# EAGLE board main (EAGLE 5.09)
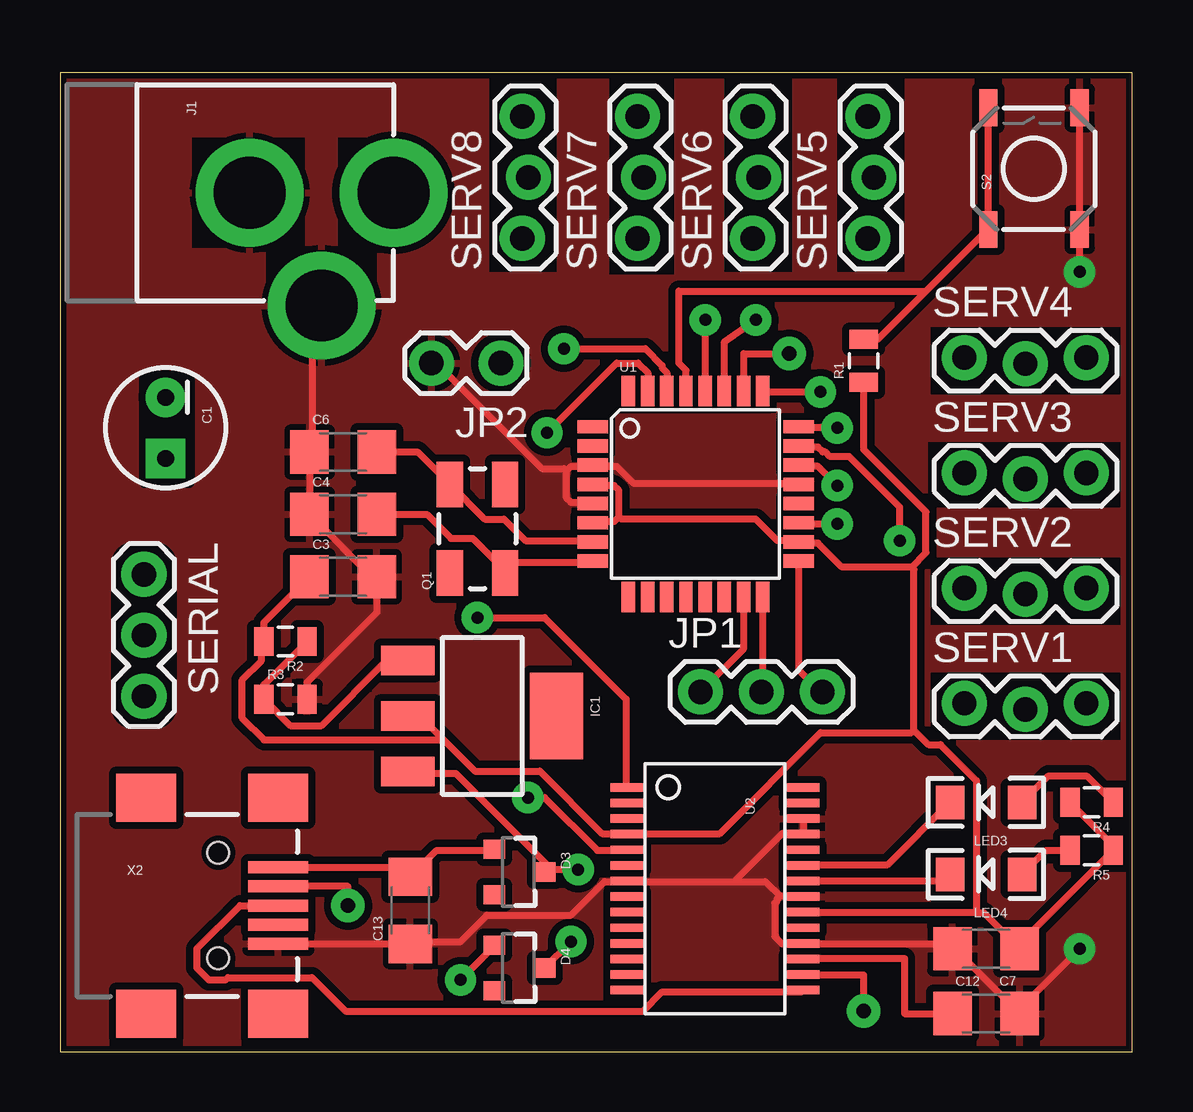
[diagram p0: board, top side]
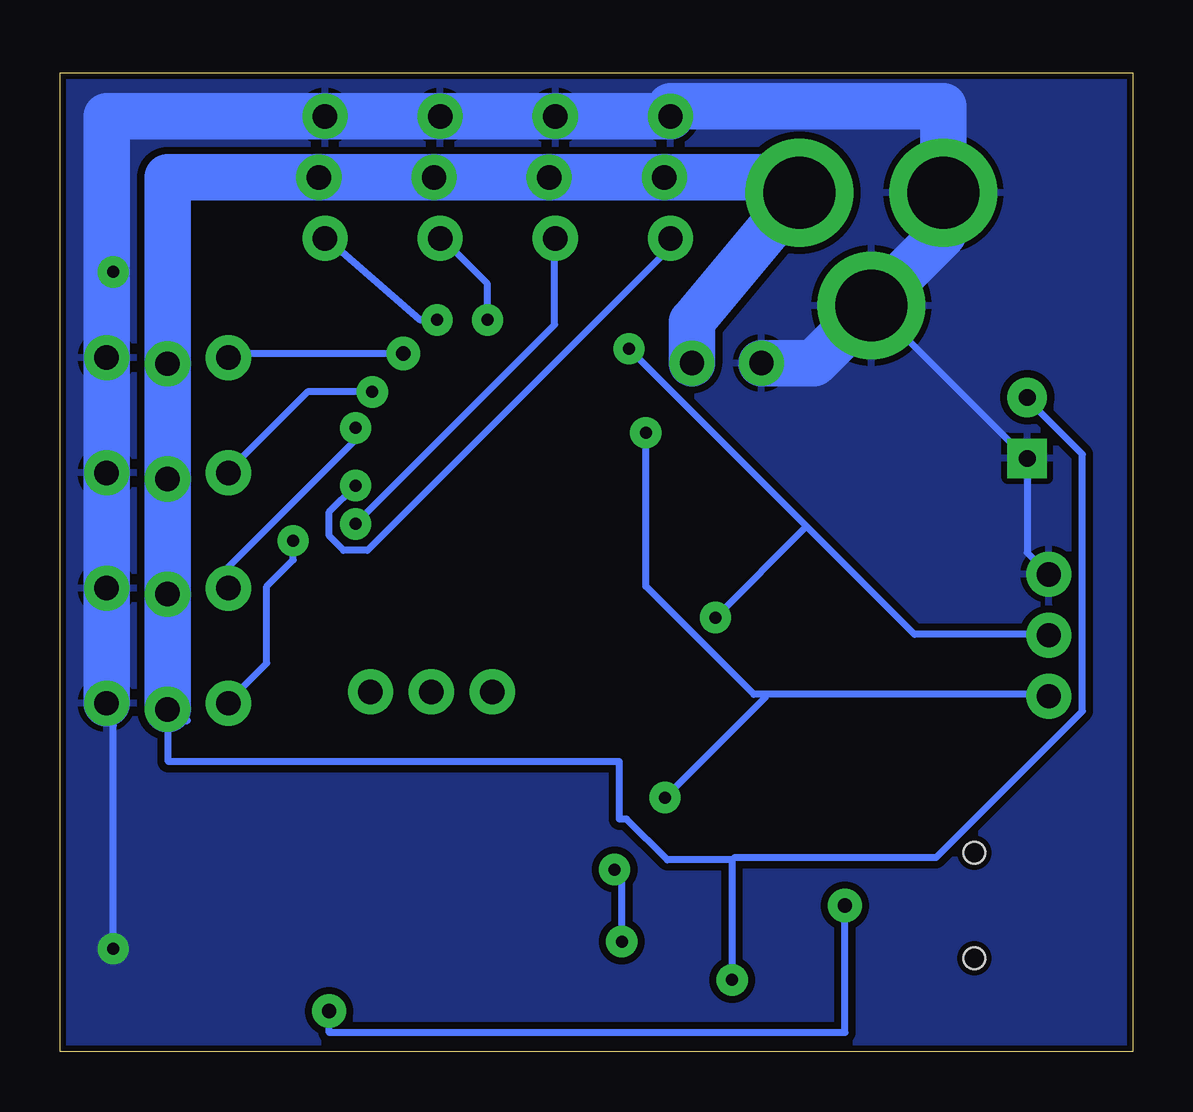
[diagram p1: board, bottom side, seen from below]

Size 44.7 x 40.8 mm. Coordinates in mm from the lower left corner, seen from the top.
Outline: 0,0 44.7,0 44.7,40.8 0,40.8 0,0
Copper layers (1*16): Top 0.035mm / dielectric 1.5mm / Bottom 0.035mm
Design rules "default *": minimum track width 0.3mm, minimum drill 0.5mm, track to track 0.3mm, track to pad 0.3mm, pad to pad 0.2mm, via to via 0.3mm, smd to smd 0.2mm, copper to edge 10mil, drill to drill 8mil, minimum pad ring 0.4mm, minimum via ring 0.4mm, stop-mask expansion 4mil, vias tented up to drill 0mil, thermal gap 10mil
tRestrict: area 36.3,27.4 to 44.2,30.2; area 36.2,22.7 to 44.2,25.4; area 36.3,17.8 to 44.2,20.6; area 36.3,13 to 44.2,15.8; area 5.5,33.5 to 10.2,38.1; area 11.6,33.6 to 13.8,38.1; area 8.6,31.3 to 13.2,33.4; area 17.9,32.5 to 20.7,40.4; area 22.9,32.4 to 25.6,40.4; area 27.7,32.5 to 30.5,40.4; area 32.4,32.5 to 35.2,40.4; area 3.5,23.7 to 5.4,28.2; 1 more areas
vRestrict: area 23,19.8 to 30,26.7; area 24.3,1.5 to 30.3,12.1; area 0.7,2.2 to 10,9.9; area 0.3,31.3 to 14,40.4; area 37.7,33.7 to 43.8,39.9; area 2,23.6 to 6.8,28.5

## Footprints (pad centres in the part's own frame; a part is rotated, then mirrored left to right if it is on the bottom)
CPOL-RADIAL-10UF-25V = drill 0.7 pad 1.651 square: 1 1.27,0 | drill 0.7 pad 1.651 round: 2 -1.27,0
1206 = smd 1.6 x 1.8: 1 -1.4,0; 2 1.4,0
SOT23-3 = smd 0.8 x 0.9: 1 -0.95,-1; 2 0.95,-1; 3 0,1.1
SOT223 = smd 1.219 x 2.235: 1 -2.311,-3.099; 2 0,-3.099; 3 2.311,-3.099 | smd 3.6 x 2.2: 4 0,3.099
POWER_JACK_PTH = drill 2.997 round: GND 0,7.7; GNDBREAK 4.7,10.7; PWR 0,13.7
1X03 = drill 1.016 pad 1.88 round: 1 0,0; 2 2.54,0; 3 5.08,0
1X02_LOCK = drill 1.016 pad 1.88 round: 1 -0.178,0; 2 2.718,0
LED-1206 = smd 1.2 x 1.4: A -1.5,0; C 1.5,0
CRYSTAL-SMD-5X3 = smd 1.9 x 1.1: 1 -1.85,-1.15; 2 1.85,-1.15; 3 1.85,1.15; 4 -1.85,1.15
0805 = smd 0.8 x 1.2: 1 -0.9,0; 2 0.9,0
TACTILE_SWITCH_SMD = smd 1.524 x 0.762: 1 -2.54,1.905; 2 2.54,1.905; 3 -2.54,-1.905; 4 2.54,-1.905
1X03_LOCK = drill 1.016 pad 1.88 round: 1 0,0.127; 2 2.54,-0.127; 3 5.08,0.127
TQFP32-08 = smd 1.27 x 0.559: 1 -4.293,2.8; 2 -4.293,2; 3 -4.293,1.2; 4 -4.293,0.4; 5 -4.293,-0.4; 6 -4.293,-1.2; 7 -4.293,-2; 8 -4.293,-2.8; 17 4.293,-2.8; 18 4.293,-2; 19 4.293,-1.2; 20 4.293,-0.4; 21 4.293,0.4; 22 4.293,1.2; 23 4.293,2; 24 4.293,2.8 | smd 0.559 x 1.27: 9 -2.8,-4.293; 10 -2,-4.293; 11 -1.2,-4.293; 12 -0.4,-4.293; 13 0.4,-4.293; 14 1.2,-4.293; 15 2,-4.293; 16 2.8,-4.293; 25 2.8,4.293; 26 2,4.293; 27 1.2,4.293; 28 0.4,4.293; 29 -0.4,4.293; 30 -1.2,4.293; 31 -2,4.293; 32 -2.8,4.293
SSOP28DB = smd 0.348 x 1.397: 1 -4.225,-3.656; 2 -3.575,-3.656; 3 -2.925,-3.656; 4 -2.275,-3.656; 5 -1.625,-3.656; 6 -0.975,-3.656; 7 -0.325,-3.656; 8 0.325,-3.656; 9 0.975,-3.656; 10 1.625,-3.656; 11 2.275,-3.656; 12 2.925,-3.656; 13 3.575,-3.656; 14 4.225,-3.656; 15 4.225,3.656; 16 3.575,3.656; 17 2.925,3.656; 18 2.275,3.656; 19 1.625,3.656; 20 0.975,3.656; 21 0.325,3.656; 22 -0.325,3.656; 23 -0.975,3.656; 24 -1.625,3.656; 25 -2.275,3.656; 26 -2.925,3.656; 27 -3.575,3.656; 28 -4.225,3.656
USB-MINIB = smd 2.5 x 0.5: D+ 2.5,0; D- 2.5,0.8; GND 2.5,-1.6; ID 2.5,-0.8; VBUS 2.5,1.6 | smd 2.5 x 2: GND@1 -3,-4.5; GND@2 -3,4.5; GND@3 2.5,4.5; GND@4 2.5,-4.5 | hole 0.9: 0,2.2; 0,-2.2

## Placement (x,y rotation side)
C1  [CPOL-RADIAL-10UF-25V]  4.4,26 270 top
C3  [1206]  11.8,19.8 0 top
C4  [1206]  11.8,22.4 0 top
C6  [1206]  11.8,25 0 top
C7  [1206]  38.6,4.3 180 top
C12  [1206]  38.6,1.6 0 top
C13  [1206]  14.6,5.9 90 top
D3  [SOT23-3]  19.1,7.5 270 top
D4  [SOT23-3]  19.1,3.5 270 top
IC1  [SOT223]  17.6,14 270 top
J1  POWER_JACKPTH  [POWER_JACK_PTH]  0.2,35.8 270 top
JP1  [1X03]  26.7,15 0 top
JP2  [1X02_LOCK]  18.2,28.7 180 top
LED3  [LED-1206]  38.6,10.4 180 top
LED4  [LED-1206]  38.6,7.4 180 top
Q1  [CRYSTAL-SMD-5X3]  17.4,21.8 90 top
R1  [0805]  33.5,28.8 90 top
R2  [0805]  9.4,17.1 180 top
R3  [0805]  9.4,14.7 0 top
R4  [0805]  43,10.4 180 top
R5  [0805]  43,8.4 180 top
S2  [TACTILE_SWITCH_SMD]  40.6,36.8 90 top
SERIAL  [1X03]  3.5,19.9 270 top
SERV1  [1X03_LOCK]  37.7,14.4 0 top
SERV2  [1X03_LOCK]  37.7,19.2 0 top
SERV3  [1X03_LOCK]  37.7,24 0 top
SERV4  [1X03_LOCK]  37.7,28.8 0 top
SERV5  [1X03_LOCK]  33.8,33.9 90 top
SERV6  [1X03_LOCK]  29,33.9 90 top
SERV7  [1X03_LOCK]  24.2,33.9 90 top
SERV8  [1X03_LOCK]  19.4,33.9 90 top
U1  ATMEGA168  [TQFP32-08]  26.49,23.25 0 top
U2  FT232RL-BASICSSOP  [SSOP28DB]  27.3,6.8 270 top
X2  USBSMD  [USB-MINIB]  6.6,6.1 0 top

## Library data of the parts
C1 C3 C4 C6 C7 C12 C13 D3 D4 IC1 J1 JP1 JP2 LED3 LED4 Q1 R1-R5 S2 SERIAL SERV1-SERV8 U1 U2 X2 = SparkFun

## Nets
5V: C3.1 C7.1 IC1.2 R1.1 R2.2 R4.2 R5.1 U1.4 U1.6 U1.18 U2.4 U2.20
GND: C1.1 C3.2 C4.1 C6.1 C7.2 C12.2 C13.1 J1.GND J1.GNDBREAK JP2.2 R3.2 S2.3 S2.4 SERIAL.1 SERV1.3 SERV2.3 SERV3.3 SERV4.3 SERV5.3 SERV6.3 SERV7.3 SERV8.3 U1.3 U1.5 U1.21 U2.7 U2.18 U2.21 U2.25 U2.26 X2.GND
N$1: LED4.A R5.2
N$2: U2.16 X2.D-
N$3: C6.2 Q1.3 U1.7
N$4: C4.2 Q1.1 U1.8
N$5: SERV1.1 U1.23
N$6: R1.2 S2.1 S2.2 U1.29
N$7: SERV2.1 U1.24
N$8: SERV3.1 U1.25
N$9: SERV4.1 U1.26
N$10: U2.15 X2.D+
N$11: LED4.C U2.22
N$12: LED3.C U2.23
N$13: C12.1 U2.17
N$14: SERIAL.3 U1.31 U2.5
N$15: SERIAL.2 U1.30 U2.1
N$16: LED3.A R4.1
N$17: SERV5.1 U1.27
N$18: SERV6.1 U1.28
N$19: JP1.1 U1.15
N$20: JP1.2 U1.16
N$21: JP1.3 U1.17
N$22: SERV7.1 U1.19
N$23: C1.2 D4.1 J1.PWR JP2.1 SERV1.2 SERV2.2 SERV3.2 SERV4.2 SERV5.2 SERV6.2 SERV7.2 SERV8.2
N$24: SERV8.1 U1.22
N$25: C13.2 D3.1 X2.VBUS
N$27: IC1.1 R2.1 R3.1
N$28: D3.3 D4.3 IC1.3

## Tracks (layer width: path | path; a pad name or v marks a point on that pad's centre or on a via)
5V
  Top 0.3: C3.1 8.5,17.9 R2.2 8.4,17 8.4,16.3 7.6,15.5 7.6,13.9 8.5,13 15.8,13 15.9,13.1 | 15.9,13.1 15,14 IC1.2 | 15.9,13.1 17.3,11.7 20,11.7 22.6,9.1 23.6,9.1 U2.4 23.7,9.1 27.5,9.1 31.7,13.3 35.5,13.3 35.6,13.4 | R4.2 43.9,8.6 R5.1 40,4.5 C7.1 38.5,5.8 38.2,5.8 | 38.2,5.8 31,5.8 U2.20 | 23.3,22.3 23.1,22.1 22.2,22.1 U1.6 | 23.3,22.3 23.3,23.4 23.1,23.6 22.2,23.6 U1.4 | R1.1 33.5,25.1 36.1,22.5 36.1,20.8 35.5,20.2 | 35.5,20.2 32.6,20.2 31.6,21.2 30.8,21.2 U1.18 30.7,21.3 29.9,21.3 29,22.2 23.4,22.2 23.3,22.3 | 35.6,13.4 36.2,12.8 36.7,12.8 38.2,11.3 38.2,5.8 | 35.6,13.4 35.6,20.1 35.5,20.2
GND  (via drill 0.5)
  Top 0.3: X2.GND C13.1 14.7,4.6 16.7,4.6 17.8,5.7 21.3,5.7 22.7,7.1 23.5,7.1 U2.7 23.7,7.1 28.2,7.1 | U2.26 31,9.7 31,9.1 U2.25 30.9,9.1 30.1,9.1 28.2,7.2 28.2,7.1 | 28.2,7.1 29.4,7.1 30,6.5 | 30,6.5 30.9,6.5 U2.21 | R3.2 10.3,15.4 13.2,18.3 C3.2 13.1,19.7 C4.1 C6.1 10.5,25.1 10.5,30.7 J1.GNDBREAK | 21.1,24.2 21.1,23.1 21.3,22.9 22.1,22.9 U1.5 | 21.1,24.2 21.3,24.4 22.1,24.4 U1.3 22.3,24.4 23.2,24.4 23.9,23.7 30.7,23.7 U1.21 | S2.4 42.5,39.3 42.5,34.3 S2.3 42.5,34.2 v42.5,32.5 | v42.5,4.3 40,1.8 C12.2 37.3,4.3 C7.2 37,4.5 31,4.5 U2.18 30.9,4.5 30.1,4.5 29.8,4.8 29.8,6.2 29.9,6.3 29.9,6.4 30,6.5 | 21.1,24.2 21,24.3 20.1,24.3 15.7,28.7 JP2.2
  Bottom 0.3: SERIAL.1 4.4,20.8 C1.1 4.5,24.8 10.2,30.5 J1.GNDBREAK | 42.78,32.5 v42.5,32.5 | v42.5,4.3 42.5,13.6 SERV1.3
  Bottom 1.93: 7.9,38.98 7.9,39.4 19.27,39.4 SERV8.3
  Bottom 1.94: SERV1.3 SERV2.3 SERV3.3 SERV4.3 42.78,32.5 42.78,38.98 SERV5.3 SERV6.3 SERV7.3 SERV8.3 | 7.9,38.98 J1.GND 7.9,34.1 J1.GNDBREAK 13.3,28.7 JP2.2
  pour Top: 0.1,40.9 44.8,40.9 44.8,0 0.1,0
  pour Bottom: 0.1,40.6 44.7,40.6 44.7,0.1 0.1,0.1
N$1
  Top 0.3: R5.2 41.1,8.4 LED4.A
N$2  (via drill 0.6)
  Top 0.3: X2.D- 12,6.9 v12,6.1 | v33.5,1.7 33.5,3.2 30.96,3.2 U2.16
  Bottom 0.3: v12,6.1 12,0.8 33.5,0.8 v33.5,1.7
N$3
  Top 0.3: U1.7 22.1,21.3 19.4,21.3 18.5,22.2 17.7,22.2 Q1.3 14.9,25 C6.2
N$4
  Top 0.3: U1.8 22.1,20.4 19,20.4 Q1.1 18.5,20.1 17.2,21.4 16.3,21.4 15.3,22.4 C4.2
N$5  (via drill 0.5)
  Top 0.3: v35,21.3 35,22.7 32.9,24.8 32.1,24.8 31.9,25 31.8,25 31.6,25.2 30.8,25.2 U1.23
  Bottom 0.3: v35,21.3 35,20.5 36.1,19.4 36.1,16.2 37.7,14.6 SERV1.1
N$6
  Top 0.3: R1.2 34.1,29.7 36.1,31.7 | 36.1,31.7 38.6,34.2 S2.1 38.7,34.4 38.7,39.3 S2.2 | 36.1,31.7 25.8,31.7 25.8,28.7 26.1,28.4 26.1,27.6 U1.29
N$7  (via drill 0.5)
  Top 0.3: v32.4,26 30.8,26 U1.24
  Bottom 0.3: v32.4,26 32.4,25.5 37.7,20.2 SERV2.1
N$8  (via drill 0.5)
  Top 0.3: v31.7,27.5 29.3,27.5 U1.25
  Bottom 0.3: v31.7,27.5 34.4,27.5 37.7,24.2 SERV3.1
N$9  (via drill 0.6)
  Top 0.3: U1.26 28.5,29.1 v30.4,29.1
  Bottom 0.3: v30.4,29.1 37.7,29.1 SERV4.1
N$10
  Top 0.3: X2.D+ 7.5,6.1 5.7,4.3 5.7,3.5 6.2,3 6.9,3 7,3.1 10.5,3.1 11.9,1.7 24.3,1.7 25.1,2.5 30.9,2.5 U2.15
N$11
  Top 0.3: U2.22 37.1,7.12 LED4.C
N$12
  Top 0.3: LED3.C 34.5,7.8 31,7.8 U2.23
N$13
  Top 0.3: C12.1 35.2,1.6 35.2,3.9 30.96,3.9 U2.17
N$14  (via drill 0.5)
  Top 0.3: v20.3,25.8 23.2,28.7 24.1,28.7 24.5,28.3 24.5,27.6 U1.31 | v19.5,10.6 20.2,10.6 22.4,8.4 23.6,8.4 U2.5
  Bottom 0.3: v20.3,25.8 20.3,19.4 15.8,14.9 15.3,14.9 | 15.3,14.9 3.5,14.9 SERIAL.3 | v19.5,10.6 15.3,14.8 15.3,14.9
N$15  (via drill 0.5)
  Top 0.3: v21,29.3 24.4,29.3 25.1,28.6 25.1,28.5 25.3,28.3 25.3,27.6 U1.30 | v17.4,18.1 20.2,18.1 23.6,14.7 23.6,11.1 U2.1
  Bottom 0.3: 13.6,21.9 9.1,17.4 3.5,17.4 SERIAL.2 | 13.6,21.9 v21,29.3 | 13.6,21.9 v17.4,18.1
N$16
  Top 0.3: R4.1 42.8,11.5 41.2,11.5 LED3.A
N$17  (via drill 0.5)
  Top 0.3: v29,30.5 27.7,29.6 27.7,27.6 U1.27
  Bottom 0.3: v29,30.5 29.7,30.5 33.6,33.9 SERV5.1
N$18  (via drill 0.5)
  Top 0.3: v26.9,30.5 26.9,27.6 U1.28
  Bottom 0.3: v26.9,30.5 26.9,32 28.8,33.9 SERV6.1
N$19
  Top 0.3: JP1.1 28.5,16.8 28.5,18.9 U1.15
N$20
  Top 0.3: U1.16 29.3,18.9 29.3,15 JP1.2
N$21
  Top 0.3: U1.17 30.8,20.4 30.8,15.9 31.7,15 JP1.3
N$22  (via drill 0.5)
  Top 0.3: v32.4,22 30.8,22 U1.19
  Bottom 0.3: v32.4,22 24.1,30.3 24.1,33.9 SERV7.1
N$23  (via drill 0.5)
  Top 0.3: v16.7,3 18.1,4.4 D4.1
  Bottom 0.3: SERV1.2 39.4,13.8 40.2,13.8 40.2,12.1 21.4,12.1 21.4,9.7 21.1,9.7 19.4,8 16.7,8 | 16.6,2.7 v16.7,3 16.7,8 | C1.2 4.4,27.2 2.1,24.9 2.1,14.2 8.2,8.1 16.6,8.1 16.7,8
  Bottom 1.94: SERV1.2 SERV2.2 SERV3.2 SERV4.2 40.24,36.44 SERV5.2 SERV6.2 SERV7.2 SERV8.2 13.9,36.44 J1.PWR 18.38,30.42 JP2.1
N$24  (via drill 0.5)
  Top 0.3: v32.4,23.6 31.6,24.4 30.8,24.4 U1.22
  Bottom 0.3: v32.4,23.6 33.5,22.5 33.5,21.5 32.9,20.9 31.9,20.9 19.3,33.5 19.3,33.9 SERV8.1
N$25
  Top 0.3: D3.1 18.1,8.4 15.7,8.4 C13.2 14.8,7.7 X2.VBUS
N$27
  Top 0.3: R2.1 8.5,15.3 R3.1 9.6,13.6 10.9,13.6 13.6,16.3 IC1.1
N$28  (via drill 0.5)
  Top 0.3: D4.3 v21.3,4.6 | v21.6,7.6 20.3,7.6 D3.3 20.4,7.7 16.5,11.6 14.6,11.6 IC1.3
  Bottom 0.3: v21.3,4.6 21.3,7.3 v21.6,7.6